# Altium PCB MCP6004.pcbdoc
Units mm, origin at the board's own origin, x right, y up, seen from the top; angles counter-clockwise.
Board outline 38.64 x 33.23 mm, 2 copper layers (Top Layer, Bottom Layer); 1 components, 0 nets, 14 pads, 0 vias.
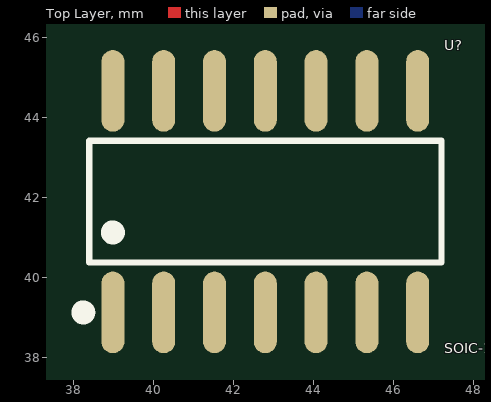
[diagram p0: Top Layer view]
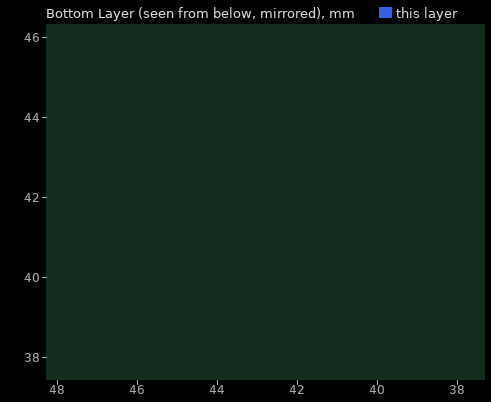
[diagram p1: Bottom Layer view, seen from below]

## Layer stack, top to bottom
Top Layer: signal copper (thickness not stored)
Dielectric: dielectric 0.32, FR-4, Dk 4.8
Bottom Layer: signal copper (thickness not stored)

## Board outline
64.041,25.4 25.4,25.4 25.4,58.63 64.041,58.63

## Components (designator, comment, footprint, x,y, rotation, side; value= is the part's Value field where it differs from the comment)
U? "SOIC-14_L8.7-W3.9-P1.27-LS6.0-BL" SOIC-14_L8.7-W3.9-P1.27-LS6.0-BL 42.688,41.888 r0 top

## Footprints (in the part's own frame and the unit in brackets; to place one, negate y for a bottom-side part, rotate by r counter-clockwise, add the part's x,y. Pads: shape width x height; smd on the part's side, far side on the other; paste and mask are expansions set on the pad)
SOIC-14_L8.7-W3.9-P1.27-LS6.0-BL [mm]
  oval 0.574x2.038 smd paste+0 mask+0.051: 1(-3.699,-2.769) 2(-2.429,-2.769) 3(-1.159,-2.769) 4(0.111,-2.769) 5(1.381,-2.769) 6(2.651,-2.769) 7(3.921,-2.769) 8(3.921,2.769) 9(2.651,2.769) 10(1.381,2.769) 11(0.111,2.769) 12(-1.159,2.769) 13(-2.429,2.769) 14(-3.699,2.769)
  silkscreen extent -4.59,-2.92 4.51,1.52

## Nets (pads, with @x,y where several pads share a name; then routed paths per layer and width w, separated by ;. In a path a pad name is that pad's centre, name@x,y a point inside that pad or via, vN(x,y) a via of type N, cw(c..) or ccw(c..) an arc to the next point about the centre after c; other vN are vias at no path point)
pads on no net: U?.1 U?.2 U?.3 U?.4 U?.5 U?.6 U?.7 U?.8 U?.9 U?.10 U?.11 U?.12 U?.13 U?.14